# Altium PCB PsocrobotWhitESP8266.PcbDoc
Units mm, origin at the board's own origin, x right, y up, seen from the top; angles counter-clockwise.
Board outline 170.82 x 95.89 mm, 2 copper layers (Top Layer, Bottom Layer); 43 components, 45 nets, 182 pads, 12 vias.
Unrouted connection lines stored in the file: 62.
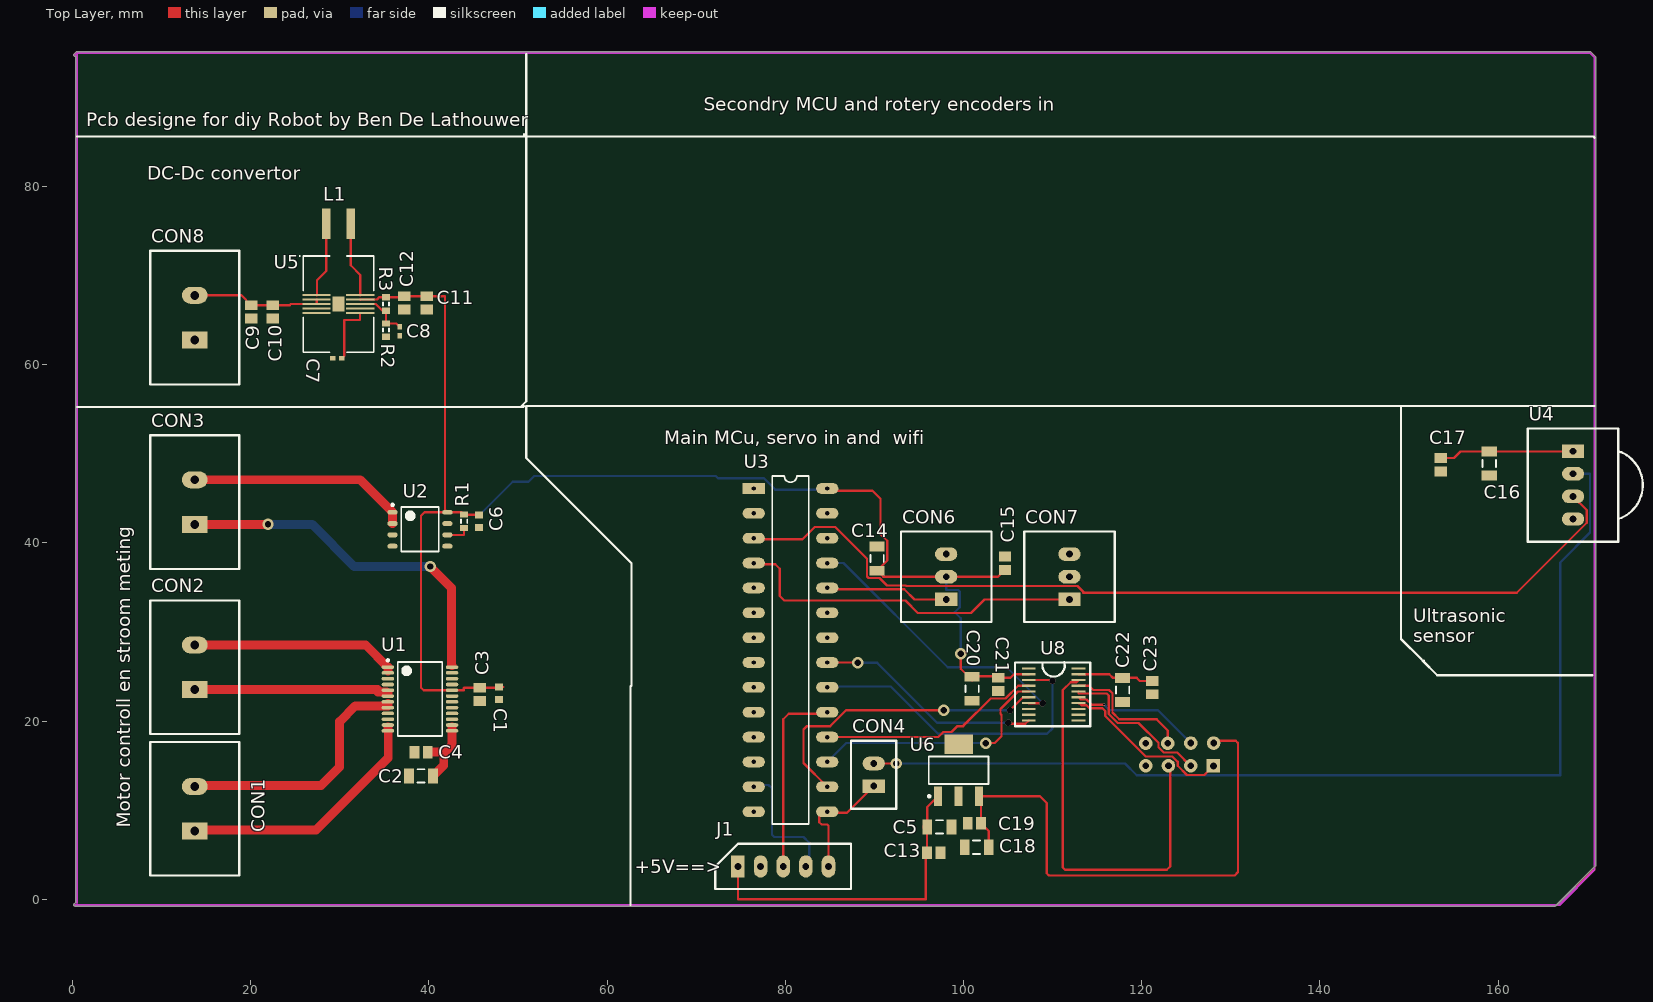
[diagram p0: Top Layer view]
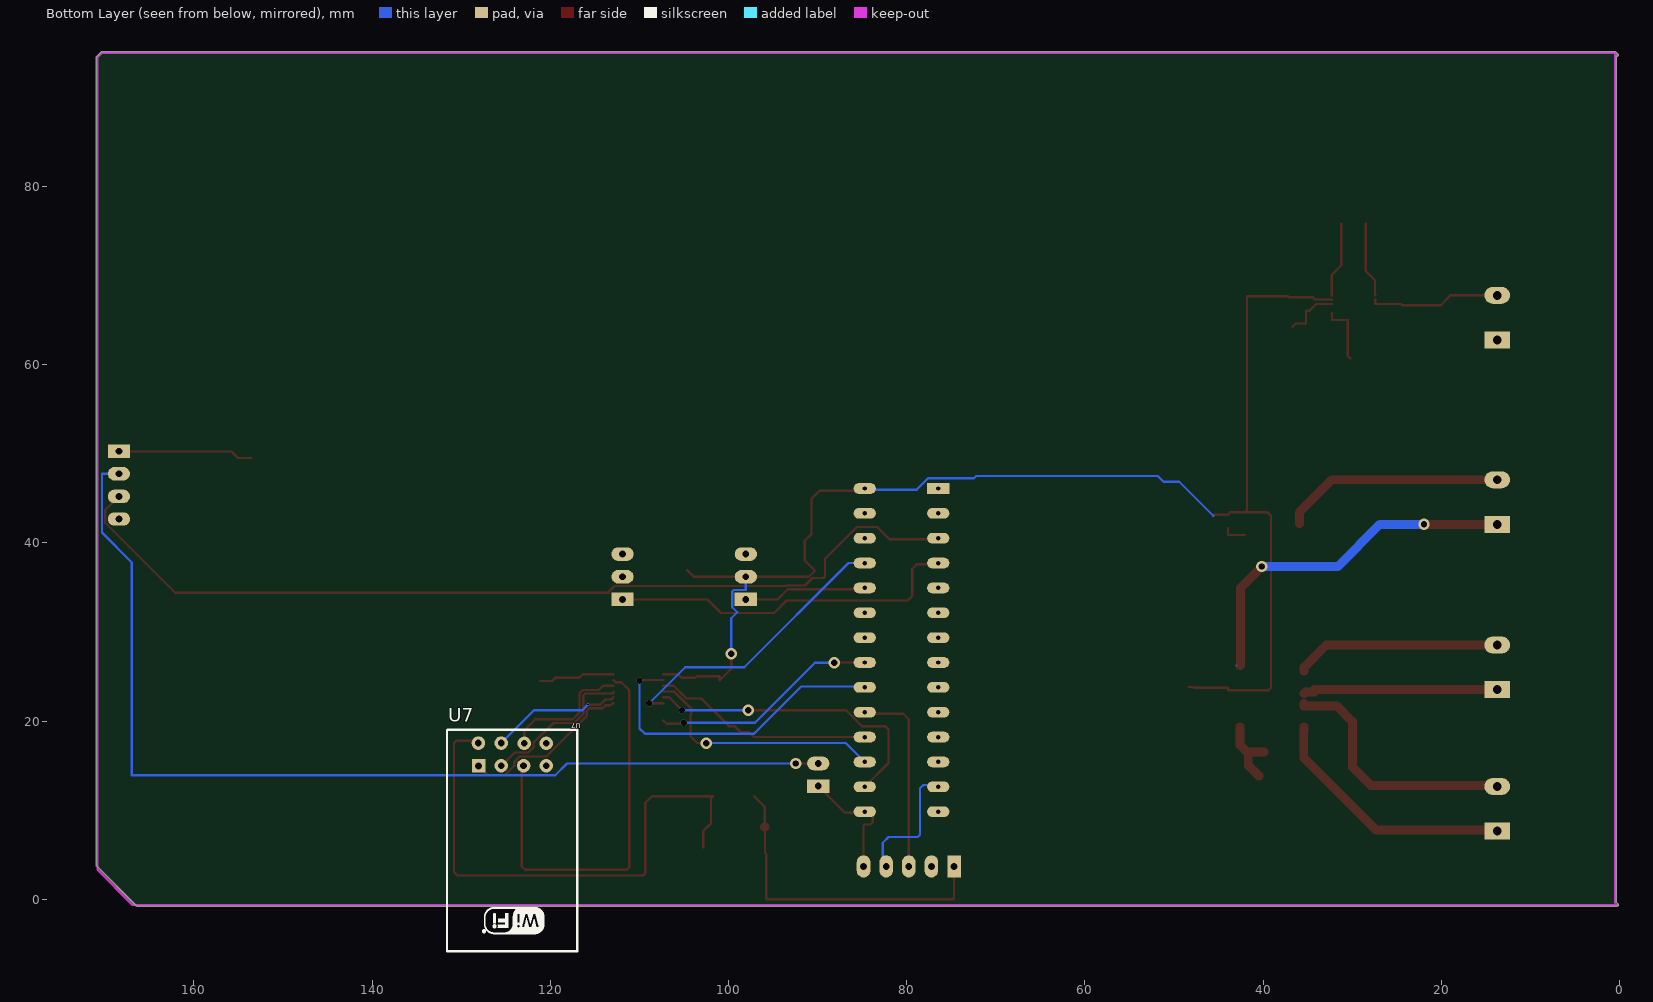
[diagram p1: Bottom Layer view, seen from below]

## Layer stack, top to bottom
Top Solder: solder mask 0.0102, Solder Resist, Dk 3.5
Top Layer: signal copper 0.0356
Dielectric 1: dielectric 0.32, FR-4, Dk 4.8
Bottom Layer: signal copper 0.0356
Bottom Solder: solder mask 0.0102, Solder Resist, Dk 3.5

## Board outline
0.254,-0.762 cw(c0.254,-0.635) 0.164,-0.544 0.164,-0.545 0.381,-0.328 0.381,94.688 0.344,94.652 cw(c0.254,94.742) 0.164,94.832 0.418,95.086 0.417,95.086 cw(c0.508,94.996) 0.508,95.123 170.307,95.123 cw(c170.307,94.996) 170.398,95.086 170.397,95.086 170.905,94.578 170.905,94.579 cw(c170.815,94.488) 170.942,94.488 170.942,3.81 cw(c170.815,3.81) 170.905,3.719 170.905,3.72 166.46,-0.725 166.461,-0.725 cw(c166.37,-0.635) 166.37,-0.762

## Design rules (kind name [scope] priority, off if disabled: settings)
Clearance [All] p1: gap=0.153
HoleSize [All] p1: absolutevalues=TRUE maxlimit=6.35 minlimit=0.3 maxpercent=80.000 minpercent=20.000
PolygonConnect [All] p1: connectstyle=Relief reliefconductorwidth=0.254 reliefentries=4 polygonreliefangle="90 Angle" airgapwidth=0.254
RoutingVias [All] p1: holewidth=0.711 width=1.27 viastyle="Through Hole" minholewidth=0.711 minwidth=1.27 maxholewidth=0.711 maxwidth=1.27
SolderMaskExpansion [All] p1: expansion=0.102
Width [All] p1: maxlimit=1 minlimit=0.254 preferedwidth=0.254
29 further rules are at their usual default settings.

## Classes and differential pairs
component class U_UltraSoonSensor: C16 C17 U4
component class U_Reciever: C14 C15 CON6 CON7
component class U_PSU: C7 C8 C9 C10 C11 C12 CON8 L1 R2 R3 U5
component class U_Psoc-robot: C5 C13 C18 C19 J1 U3 U6
component class U_motor: C1 C2 C3 C4 C6 CON1 CON2 CON3 R1 U1 U2
component class U_ESP8266: C20 C21 C22 C23 U8
component class top: CON4

## Components (designator, comment, footprint, x,y, rotation, side; value= is the part's Value field where it differs from the comment)
C1 "Cap Semi" 1608[0603] 47.879,23.114 r270 top
C2 "Cap Semi" C1206 39.116,13.843 r180 top
C3 "Cap Pol3" C0805 45.72,22.987 r270 top
C4 "Cap Pol3" C0805 39.116,16.51 r180 top
C5 "Cap Semi" C1206 97.282,8.128 r0 top
C6 "Cap Semi" 1608[0603] 45.593,42.418 r270 top
C7 "Cap" 0402 29.718,60.706 r0 top
C8 "Cap" 0402 36.703,63.754 r90 top
C9 "Cap Pol3" C0805 20.066,65.913 r270 top
C10 "Cap Pol3" C0805 22.479,65.913 r270 top
C11 "Cap Pol3" C0805 39.751,66.929 r270 top
C12 "Cap Pol3" C0805 37.211,66.929 r270 top
C13 "Cap Pol3" C0805 96.647,5.207 r0 top
C14 "Cap Semi" C1206 90.297,38.227 r90 top
C15 "Cap Pol3" C0805 104.648,37.719 r90 top
C16 "Cap Semi" C1206 159.004,48.895 r270 top
C17 "Cap Pol3" C0805 153.543,48.768 r270 top
C18 "Cap Semi" C1206 101.473,5.842 r180 top
C19 "Cap Pol3" C0805 101.219,8.509 r180 top
C20 "Cap Semi" C1206 100.965,23.622 r270 top
C21 "Cap Pol3" C0805 103.886,24.118 r270 top
C22 "Cap Semi" C1206 117.856,23.495 r270 top
C23 "Cap Pol3" C0805 121.158,23.749 r270 top
CON1 "Schrew terminal" SCREWTERMINAL 13.716,10.16 r90 top
CON2 "Schrew terminal" SCREWTERMINAL 13.716,26.035 r90 top
CON3 "Screw terminal" SCREWTERMINAL 13.716,44.577 r90 top
CON4 "2PinsHeader" 2PINSHEADER 97.536,-2.54 r90 top
CON6 "RCcon" RCCON 98.044,36.195 r90 top
CON7 "RCcon" RCCON 111.887,36.195 r90 top
CON8 "Schrew terminal" SCREWTERMINAL 13.716,65.278 r90 top
J1 "IISP header" "Programm header" 79.756,3.683 r0 top
L1 "coil" Coil 29.845,75.819 r0 top
R1 "Res3" J1-0603 43.942,42.418 r270 top
R2 "Res3" J1-0603 35.179,63.881 r90 top
R3 "Res3" J1-0603 35.179,66.802 r90 top
U1 "TB6612FGN" TBS6612FNG 38.989,22.479 r0 top
U2 "Component_1" ACS711 38.989,41.529 r0 top
U3 "Component_1" CY8C29466 76.454,46.101 r0 top
U4 "hc-sr04" ultrasoonSensor 168.402,50.292 r270 top
U5 "TPS630xx" TPS63061 29.845,66.802 r0 top
U6 "LM7803" LM7805 99.441,14.478 r90 top
U7 "ESP8266 ESP-01" "ESP8266 ESP-01" 116.967,19.05 r0 bottom
U8 "TXb0108" TXB0108 110.109,22.987 r270 top

## Footprints (in the part's own frame and the unit in brackets; to place one, negate y for a bottom-side part, rotate by r counter-clockwise, add the part's x,y. Pads: shape width x height; smd on the part's side, far side on the other; paste and mask are expansions set on the pad)
2PINSHEADER [mil]
  rect 60x98.43 hole 30: 1(600,300)
  oval 60x98.43 hole 30: 2(700,300)
  silkscreen extent 500,200 800,400
0402 [mm] "Chip Capacitor, Body 1.0x0.5mm, IPC High Density"
  rect 0.6x0.5 smd: 1(-0.5,0) 2(0.5,0)
  body extent -0.55,-0.3 0.55,0.3, height 1.3
1608[0603] [mm] "Chip Capacitor, Body 1.6x0.8mm, IPC High Density"
  rect 0.8x0.9 smd: 1(-0.7,0) 2(0.7,0)
  body extent -0.87,-0.48 0.87,0.48, height 1.3
ACS711 [mm] "SOIC, 8-Leads, Body 4.90x4.90mm, Pitch 1.27mm, IPC Low Density"
  oval 1.15x0.55 smd: 1(-3.075,1.905) 2(-3.075,0.635) 3(-3.075,-0.635) 4(-3.075,-1.905) 5(3.075,-1.905) 6(3.075,-0.635) 7(3.075,0.635) 8(3.075,1.905)
  silkscreen extent -3.2,-2.5 2.1,2.85
C0805 [mm] "Chip Capacitor, Body 2.0x1.3mm, IPC High Density"
  rect 1.1x1.4 smd: 1(-0.75,0) 2(0.75,0)
  body extent -1.1,-0.72 1.1,0.72, height 1.4
C1206 [mm] "Chip Capacitor, Body 3.2x1.6mm, IPC High Density"
  rect 1.1x1.7 smd: 1(-1.35,0) 2(1.35,0)
  silkscreen extent -0.4,-0.75 0.4,0.75, body extent -1.7,-0.9 1.7,0.9, height 1.3
Coil [mm]
  rect 0.98x3.4 smd: 1(-1.365,0) 2(1.365,0)
CY8C29466 [mm]
  rect 2.5x1.2 hole 0.5: 1(0,0)
  oval 2.5x1.2 hole 0.5: 2(0,-2.79) 3(0,-5.58) 4(0,-8.37) 5(0,-11.16) 6(0,-13.95) 7(0,-16.74) 8(0,-19.53) 9(0,-22.32) 10(0,-25.11) 11(0,-27.9) 12(0,-30.69) 13(0,-33.48) 14(0,-36.27) 15(8.25,-36.27) 16(8.25,-33.48) 17(8.25,-30.69) 18(8.25,-27.9) 19(8.25,-25.11) 20(8.25,-22.32) 21(8.25,-19.53) 22(8.25,-16.74) 23(8.25,-13.95) 24(8.25,-11.16) 25(8.25,-8.37) 26(8.25,-5.58) 27(8.25,-2.79) 28(8.25,0)
  silkscreen extent 2.08,-37.66 6.16,1.39
"ESP8266 ESP-01" [mil] "ESP8266 ESP-01"
  rect 60x60 hole 30: 1(436,161)
  round 60 hole 30: 2(437,60) 3(336,160) 4(336,60) 5(237,160) 6(234,61) 7(137,160) 8(137,61)
  silkscreen extent 0,1 575,980, body extent 1,2 572,978, height 231
J1-0603 [mm] "Chip Resistor, Body 1.6x0.8mm, IPC High Density"
  rect 0.7x0.9 smd: 1(-0.75,0) 2(0.75,0)
  silkscreen extent -0.2,-0.35 0.2,0.35, body extent -0.85,-0.48 0.85,0.48, height 0.9
LM7805 [mm] "SOT223, 4-Leads, Body 6.50x7.00mm (avg), Pitch 2.30mm, IPC Medium Density"
  rect 2.15x0.9 smd: 1(-2.925,2.3) 2(-2.925,0) 3(-2.925,-2.3)
  rect 2.15x3.2 smd: 4(2.925,0)
  silkscreen extent -3.05,-3.35 1.55,3.42, body extent -1.85,-3.35 1.85,3.35, height 1.8
"Programm header" [mil]
  rect 60x98.43 hole 30: 1(-200,0)
  oval 60x98.43 hole 30: 2(-100,0) 3(0,0) 4(100,0) 5(200,0)
  silkscreen extent -300,-100 300,100
RCCON [mil]
  rect 60x98.43 hole 30: 1(-100,0)
  oval 60x98.43 hole 30: 2(0,0) 3(100,0)
  silkscreen extent -200,-200 200,200
SCREWTERMINAL [mm]
  rect 1.9x2.9 hole 1: 1(-2.5,0)
  oval 1.9x2.9 hole 1: 2(2.5,0)
  silkscreen extent -7.5,-5 7.5,5
TBS6612FNG [mm] "TSOP, 24-Leads, Body 8.30x5.60mm, Pitch 0.65mm, IPC Medium Density"
  oval 1.4x0.4 smd: 1(-3.6,3.575) 2(-3.6,2.925) 3(-3.6,2.275) 4(-3.6,1.625) 5(-3.6,0.975) 6(-3.6,0.325) 7(-3.6,-0.325) 8(-3.6,-0.975) 9(-3.6,-1.625) 10(-3.6,-2.275) 11(-3.6,-2.925) 12(-3.6,-3.575) 13(3.6,-3.575) 14(3.6,-2.925) 15(3.6,-2.275) 16(3.6,-1.625) 17(3.6,-0.975) 18(3.6,-0.325) 19(3.6,0.325) 20(3.6,0.975) 21(3.6,1.625) 22(3.6,2.275) 23(3.6,2.925) 24(3.6,3.575)
  silkscreen extent -3.72,-4.15 2.5,4.45, body extent -2.9,-4.15 2.9,4.15, height 1.6
TPS63061 [mm] "SON, 10-Leads, Body 10.30x7.50mm, Pitch 0.50mm, Thermal Pad 1.70x1.34mm, IPC High Density"
  rect 3.15x0.25 smd: 1(-2.445,1) 2(-2.445,0.5) 3(-2.445,0) 4(-2.445,-0.5) 5(-2.445,-1) 6(2.445,-1) 7(2.445,-0.5) 8(2.445,0) 9(2.445,0.5) 10(2.445,1)
  rect 1.34x1.7 smd: 11(0,0)
  silkscreen extent -4.4,-5.4 3.95,5.45, body extent -3.8,-5.25 3.8,5.25, height 0.8
TXB0108 [mm]
  rect 0.25x1.55 smd: 1(-2.925,-2.8) 2(-2.275,-2.8) 3(-1.625,-2.8) 4(-0.975,-2.8) 5(-0.325,-2.8) 6(0.325,-2.8) 7(0.975,-2.8) 8(1.625,-2.8) 9(2.275,-2.8) 10(2.925,-2.8) 11(2.925,2.8) 12(2.275,2.8) 13(1.625,2.8) 14(0.975,2.8) 15(0.325,2.8) 16(-0.325,2.8) 17(-0.975,2.8) 18(-1.625,2.8) 19(-2.275,2.8) 20(-2.925,2.8)
  silkscreen extent -3.63,-4.35 3.57,4.1
ultrasoonSensor [mil]
  rect 60x98.43 hole 30: 1(0,0)
  oval 60x98.43 hole 30: 2(100,0) 3(200,0)
  oval 59.06x98.43 hole 30: 4(300,0)
  silkscreen extent -100,-200 400,308

## Part data
C1 C2 C5 C6 C14 C16 C18 C20 C22: "Capacitor (Semiconductor SIM Model)"
C3 C4 C9 C10 C11 C12 C13 C15 C17 C19 C21 C23: "Polarized Capacitor (Surface Mount)"
C7 C8: library part "Cap Semi", "Capacitor (Semiconductor SIM Model)"
CON3: library part "Schrew terminal"
CON6 CON7: library part "Rc con"
R1 R2 R3: "Resistor"
U4: library part Component_1

## Via types
v1: diameter 1.27, hole 0.711, Top Layer to Bottom Layer, 7 vias
v2: diameter 0.711, hole 0.711, Top Layer to Bottom Layer, 4 vias
v3: diameter 0.25, hole 0.25, Top Layer to Bottom Layer, 1 vias

## Nets (pads, with @x,y where several pads share a name; then routed paths per layer and width w, separated by ;. In a path a pad name is that pad's centre, name@x,y a point inside that pad or via, vN(x,y) a via of type N, cw(c..) or ccw(c..) an arc to the next point about the centre after c; other vN are vias at no path point)
+3.3V: C18.1 C19.1 C22.1 C23.1 U6.3 U7.2 U8.19 | length 69.7
  Top Layer w0.254: C18.1 102.823,7.655 C19.1 101.969,11.325 U6.3 108.589,11.553 109.347,10.795 109.347,2.921 109.601,2.667 130.429,2.667 130.81,3.048 130.81,17.526 130.556,17.78 128.321,17.78 U7.2 U7.2@128.071,17.522 ; U8.19 116.343,25.262 116.76,24.845 C22.1 119.427,24.845 119.773,24.499 C23.1
+5V: C1.1 C3.1 C5.1 C6.1 C11.1 C12.1 C13.1 C14.1 C15.1 C16.1 C17.1 C20.1 C21.1 CON6.2 J1.1 R1.1 R3.2 U1.20 U2.8 U3.28 U4.1 U5.9 U6.1 U8.2 | length 214.6
  Top Layer w0.254: U5.9@32.294,67.298 U5.9 34.155,67.302 34.405,67.552 R3.2 37.084,67.552 C12.1 C11.1 41.795,67.679 41.795,43.703 U2.8 ; C6.1 45.543,43.168 R1.1 43.676,43.434 U2.8 ; C1.1@48.322,23.814 C1.1 47.802,23.737 C3.1 43.93,23.737 43.901,23.708 43.901,23.454 U1.20 39.411,23.454 39.116,23.749 39.116,43.053 39.497,43.434 U2.8 ; J1.1 74.676,0 95.758,0 95.758,5.068 C13.1 C5.1@95.897,8.093 ; U3.28@83.815,45.974 83.942,45.847 89.789,45.847 90.678,44.958 90.678,40.992 91.427,40.243 91.427,38.007 C14.1 90.979,36.195 CON6.2 103.874,36.195 C15.1@104.636,36.957 ; C5.1 95.932,10.344 U6.1 ; v1(99.695,27.559) 99.695,25.861 100.965,24.591 C20.1 101.012,25.019 103.539,25.019 103.69,24.868 105.259,24.868 105.653,25.262 U8.2 ; C17.1 155.055,49.518 155.782,50.245 C16.1 168.355,50.245 U4.1
  Top Layer w1: C5.1@95.897,8.093 C5.1
  Bottom Layer w0.254: 45.593,43.053 49.394,46.854 51.181,46.854 51.825,47.498 72.184,47.498 72.438,47.244 77.597,47.244 78.867,45.974 U3.28@83.815,45.974 ; CON6.2 98.044,34.697 99.41,34.697 99.574,34.533 99.574,32.777 99.013,32.216 99.695,31.534 v1(99.695,27.559)
AGND: U3.22
GND: C1.2 C3.2 C5.2 C6.2 C7.1 C8.1 C11.2 C12.2 C13.2 C14.2 C15.2 C16.2 C17.2 C18.2 C19.2 C20.2 C21.2 C22.2 C23.2 CON6.3 CON7.3 J1.2 R2.1 U1.18 U2.5 U3.14 U4.4 U5.4 U5.7 U6.2 U6.4 U7.7 U8.11 U8.12 U8.13
NetC7_2: C7.2 U5.6 | length 7
  Top Layer w0.254: C7.2 30.48,60.968 30.48,65.024 32.258,65.024 32.258,65.77 U5.6
NetC8_2: C8.2 R2.2 R3.1 U5.8 | length 6.3
  Top Layer w0.254: U5.8 34.036,66.802 34.786,66.052 R3.1 R2.2 36.326,64.631 C8.2
NetC9_1: C9.1 C10.1 CON8.2 U5.2 U5.3 | length 14.7
  Top Layer w0.254: CON8.2 18.951,67.778 C9.1 C10.1 24.372,66.663 24.511,66.802 U5.3 U5.2
NetCON1_1: CON1.1 U1.11 U1.12 | length 28
  Top Layer w1: CON1.1@14.264,7.747 14.304,7.787 27.345,7.787 35.433,15.875 35.433,18.86 U1.12 35.389,19.351
NetCON1_2: CON1.2 U1.7 U1.8 | length 28.7
  Top Layer w1: CON1.2@13.716,12.787 27.9,12.787 29.972,14.859 29.972,19.939 31.74,21.707 35.145,21.707 35.389,21.951 35.389,21.707
NetCON2_1: CON2.1 U1.5 U1.6 | length 22
  Top Layer w1: CON2.1 34.252,23.535 34.252,23.251 35.242,23.251 35.389,23.104
NetCON2_2: CON2.2 U1.1 U1.2 | length 23.1
  Top Layer w1: CON2.2 32.908,28.535 U1.1 35.389,25.607
NetCON3_2: CON3.2 U2.1 U2.2 | length 25
  Top Layer w1: CON3.2 32.271,47.077 U2.1 U2.2
NetCON4_1: CON4.1 J1.5 U3.15 | length 14.2
  Top Layer w0.254: J1.5 84.836,8.255 84.709,8.382 84.074,8.382 83.815,8.641 83.815,9.704 86.92,9.704 CON4.1
NetCON4_2: CON4.2 U4.2 | length 114.7
  Top Layer w0.254: CON4.2 v1(92.456,15.24)
  Bottom Layer w0.254: v1(92.456,15.24) 118.11,15.24 119.431,13.919 166.954,13.919 166.954,37.795 170.307,41.148 170.307,47.752 U4.2
NetCON6_1: CON6.1 U3.24 | length 14.7
  Top Layer w0.254: U3.24@83.815,34.814 83.831,34.798 93.345,34.798 94.488,33.655 CON6.1
NetCON7_1: CON7.1 U3.4 | length 41
  Top Layer w0.254: U3.4@75.565,37.604 75.577,37.592 78.867,37.592 79.375,37.084 79.375,34.036 79.883,33.528 93.472,33.528 94.869,32.131 100.838,32.131 102.362,33.655 CON7.1
NetJ1_3: J1.3 U3.19 | length 20.8
  Top Layer w0.254: J1.3 79.756,20.193 80.391,20.828 83.779,20.828 U3.19@83.815,20.864
NetJ1_4: J1.4 U3.13 | length 15.9
  Top Layer w0.254: U3.13@75.565,12.494 U3.13@75.613,12.446
  Bottom Layer w0.254: U3.13@75.613,12.446 75.565,12.494 75.898,12.827 78.105,12.827 78.486,12.446 78.486,7.239 78.74,6.985 82.042,6.985 82.677,6.35 82.677,4.064 J1.4
NetL1_1: L1.1 U5.1 | length 8.5
  Top Layer w0.254: U5.1 27.432,67.834 27.432,69.469 28.48,70.517 L1.1
NetL1_2: L1.2 U5.10 | length 8.5
  Top Layer w0.254: L1.2 31.21,71.152 32.29,70.072 U5.10
NetR1_2: R1.2 U2.6 U3.23 | length 2.7
  Top Layer w0.254: U2.6 43.942,40.894 R1.2
NetU1_15: U1.15 U3.2
NetU1_16: U1.16 U3.8
NetU1_17: U1.17 U3.10
NetU1_19: U1.19 U3.11
NetU1_21: U1.21 U3.5
NetU1_22: U1.22 U3.6
NetU1_23: U1.23 U3.26
NetU2_7: U2.7 U3.7
NetU3_1: U3.1 U8.1
NetU3_3: U3.3 U4.3 | length 106.1
  Top Layer w0.254: U3.3@75.565,40.394 81.92,40.394 83.309,41.783 85.598,41.783 89.167,38.214 89.167,36.211 89.331,36.047 90.551,36.047 91.393,35.205 93.514,35.205 93.566,35.153 112.797,35.153 113.417,34.533 113.417,34.411 162.098,34.411 169.932,42.245 169.932,43.682 U4.3
NetU3_16: U3.16 U8.6 | length 34.3
  Top Layer w0.254: U3.16 82.042,15.283 82.042,19.05 82.423,19.431 85.038,19.431 86.816,21.209 v1(97.79,21.209) ; v2(105.21,21.209) 106.663,22.662 U8.6
  Bottom Layer w0.254: v1(97.79,21.209) v2(105.21,21.209)
NetU3_17: U3.17 U8.5 | length 27.8
  Top Layer w0.254: v1(102.489,17.526) 103.505,17.526 104.267,18.288 104.267,20.691 104.139,20.819 104.139,21.345 106.106,23.312 U8.5
  Bottom Layer w0.254: U3.17 86.819,17.526 v1(102.489,17.526)
NetU3_18: U3.18 U8.4 | length 25
  Top Layer w0.254: U3.18 97.168,18.201 97.725,18.758 98.641,18.758 99.314,19.431 99.949,19.431 103.056,22.538 104.702,22.538 106.126,23.962 U8.4
NetU3_20: U3.20 U8.3 | length 35.8
  Top Layer w0.254: U8.3 v2@109.982,24.612
  Bottom Layer w0.254: U3.20 84.799,23.876 91.821,23.876 97.129,18.568 109.373,18.568 109.982,19.177 v2(109.982,24.511)
NetU3_21: U3.21 U8.10 | length 25.6
  Top Layer w0.254: U3.21 88.11,26.571 v1(88.138,26.543) ; v2(105.029,19.812) 105.156,19.685 106.932,19.685 U8.10
  Bottom Layer w0.254: v1(88.138,26.543) 90.297,26.543 97.028,19.812 v2(105.029,19.812)
NetU3_25: U3.25 U8.7 | length 32.3
  Top Layer w0.254: U8.7 v2(108.88,22.012)
  Bottom Layer w0.254: U3.25 86.531,37.731 98.227,26.035 104.857,26.035 v2(108.88,22.012)
NetU7_1: U7.1 U8.14 | length 19.5
  Top Layer w0.254: U8.14 112.983,22.012 113.228,21.767 113.8,21.767 114.13,21.437 115.596,21.437 115.899,21.134 115.899,20.575 120.446,16.028 123.418,16.028 124.029,15.418 124.029,14.985 125.07,13.944 127.025,13.944 U7.1
NetU7_3: U7.3 U8.16 | length 17.7
  Top Layer w0.254: U8.16 112.909,23.088 116.078,23.088 116.306,22.86 116.306,20.786 117.306,19.786 119.635,19.786 121.869,17.552 121.869,17.069 122.479,16.459 123.978,16.459 125.476,14.961 U7.3
NetU7_4: U7.4 U8.15 | length 14.7
  Top Layer w0.254: U8.15 113.154,22.417 113.8,22.417 114.373,21.844 v3(115.748,21.844)
  Bottom Layer w0.254: v3(115.748,21.844) 116.383,21.209 121.818,21.209 U7.4
NetU7_5: U7.5 U8.18 | length 45.9
  Top Layer w0.254: U8.18 112.664,24.367 112.018,24.367 111.125,23.474 111.125,3.556 111.379,3.302 122.809,3.302 123.19,3.683 123.19,14.783 U7.5
NetU7_6: U7.6 U8.17 | length 14.8
  Top Layer w0.254: U8.17 114.087,23.962 114.554,23.495 116.332,23.495 116.713,23.114 116.713,20.955 117.475,20.193 121.666,20.193 122.911,18.948 U7.6
NetU7_8: U7.8 U8.20
PGND: C2.2 C4.2 C9.2 C10.2 CON8.1 U1.3 U1.4 U1.9 U1.10 U2.3 U2.4 U5.11
VMOT: C2.1 C4.1 CON3.1 U1.13 U1.14 U1.24 | length 48.9
  Top Layer w1: CON3.1 v1(21.931,42.077) ; C4.1 41.656,16.51 ; v1(40.132,37.338) 42.545,34.925 42.545,26.301 42.589,26.257 ; C2.1 41.656,15.033 41.656,16.51 ; 42.589,19.351 U1.13 42.589,17.316 41.783,16.51 41.656,16.51
  Bottom Layer w0: 42.926,26.289 43.053,26.162
  Bottom Layer w1: v1(21.931,42.077) 26.884,42.077 31.623,37.338 v1(40.132,37.338)
pads on no net: CON7.2 U3.9 U3.12 U3.27 U5.5 U8.8 U8.9

## Keep-outs
Keep-Out Layer:
  lines w0.254: 0.254,-0.635 139.319,-0.635 166.878,-0.635 170.815,3.302 170.815,88.773 170.815,94.488 170.307,94.996 0.508,94.996 ; 0.254,94.742 0.508,94.996 ; 0.508,-0.381 0.508,94.996

## Other copper
Top Layer:
  region: 166.878,-0.381 170.561,3.302 170.815,3.302

## Silkscreen, mask and mechanical layers (free items; w line width, h text height)
Top Overlay:
  lines w0.254: 0.508,55.245 50.292,55.245 50.927,55.88 50.927,85.598 ; 0.508,85.598 50.927,85.598 ; 50.038,55.245 50.546,55.245 50.673,55.372 ; 50.673,85.598 50.673,85.852 ; 50.927,85.344 50.927,94.869 ; 62.611,-0.635 62.611,23.876 62.738,24.003 62.738,37.719 50.927,49.53 50.927,55.372 129.54,55.372 170.815,55.372 ; 149.098,55.372 149.098,41.021 149.098,35.814 149.098,29.21 151.384,26.924 ; 151.638,26.797 151.511,26.797 153.162,25.146 170.561,25.146 ; 170.815,85.471 170.688,85.598 50.927,85.598
  text "Secondry MCU and rotery encoders in" at 70.866,88.519 h1.52
  text "Pcb designe for diy Robot by Ben De Lathouwer" at 1.524,86.741 h1.52
  text "DC-Dc convertor" at 8.382,80.772 h1.52
  text "Main MCu, servo in and  wifi" at 66.421,51.054 h1.52
  text "Ultrasonic  / sensor" at 150.495,28.829 h1.52
  text "Motor controll en stroom meting" at 6.477,8.001 h1.52 r90
  text "+5V==>" at 63.119,2.921 h1.52
Mechanical 1:
  lines w0.254: 0.508,-0.635 0.508,94.996 170.815,94.996 170.815,88.519 170.815,3.175 167.259,-0.381 139.319,-0.381 0.508,-0.381

## Text inside footprints (layer, text, board x,y; h text height)
U7: Mechanical 13 "CUTOUT POLYGON" at 117.222,-4.79 h0.25 r180; Mechanical 13 "ANTENNA AREA" at 117.222,-5.298 h0.25 r180